# EAGLE board EagleSchematic (EAGLE 9.2.0)
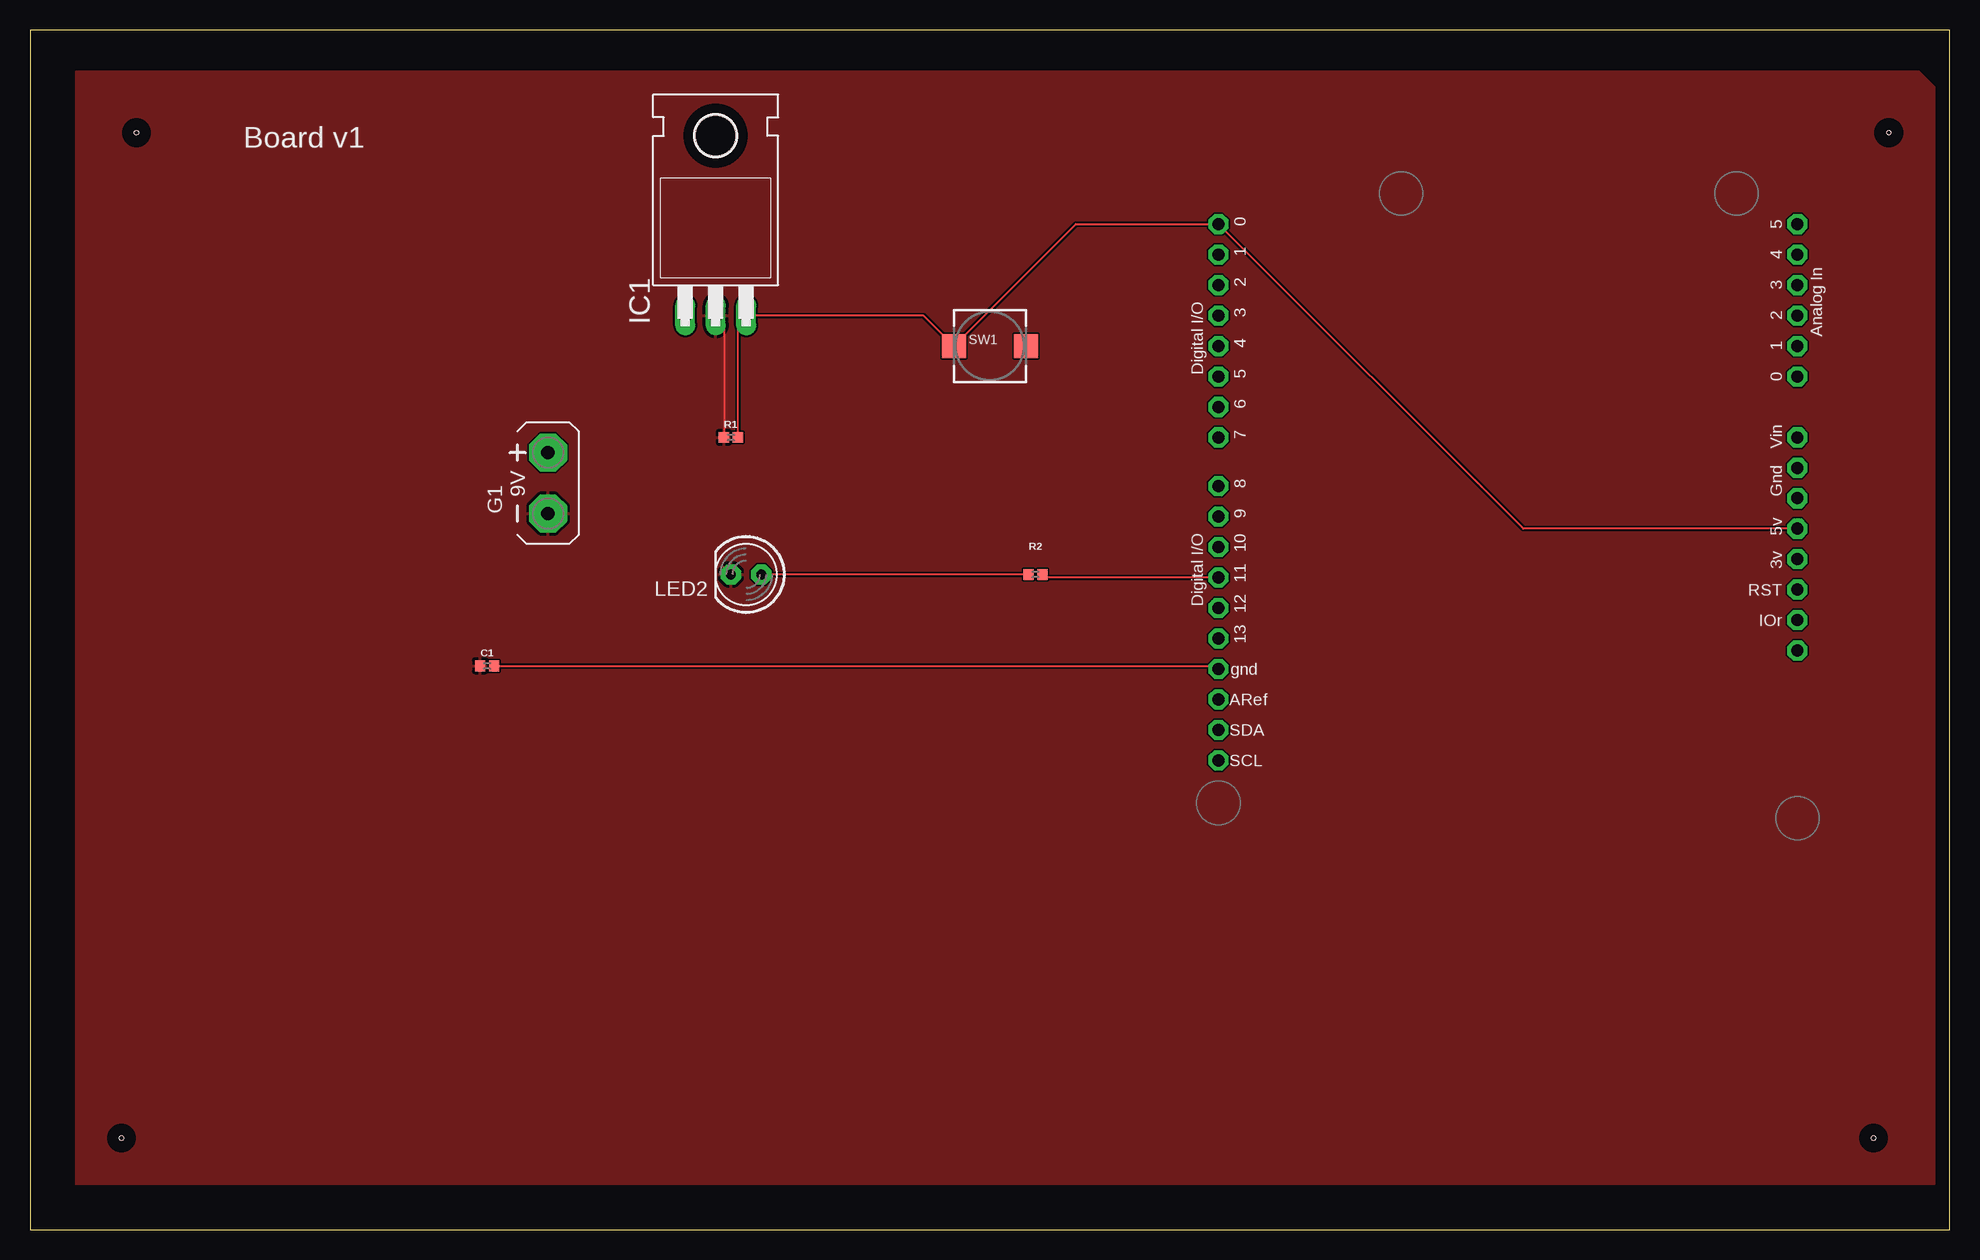
[diagram p0: board, top side]
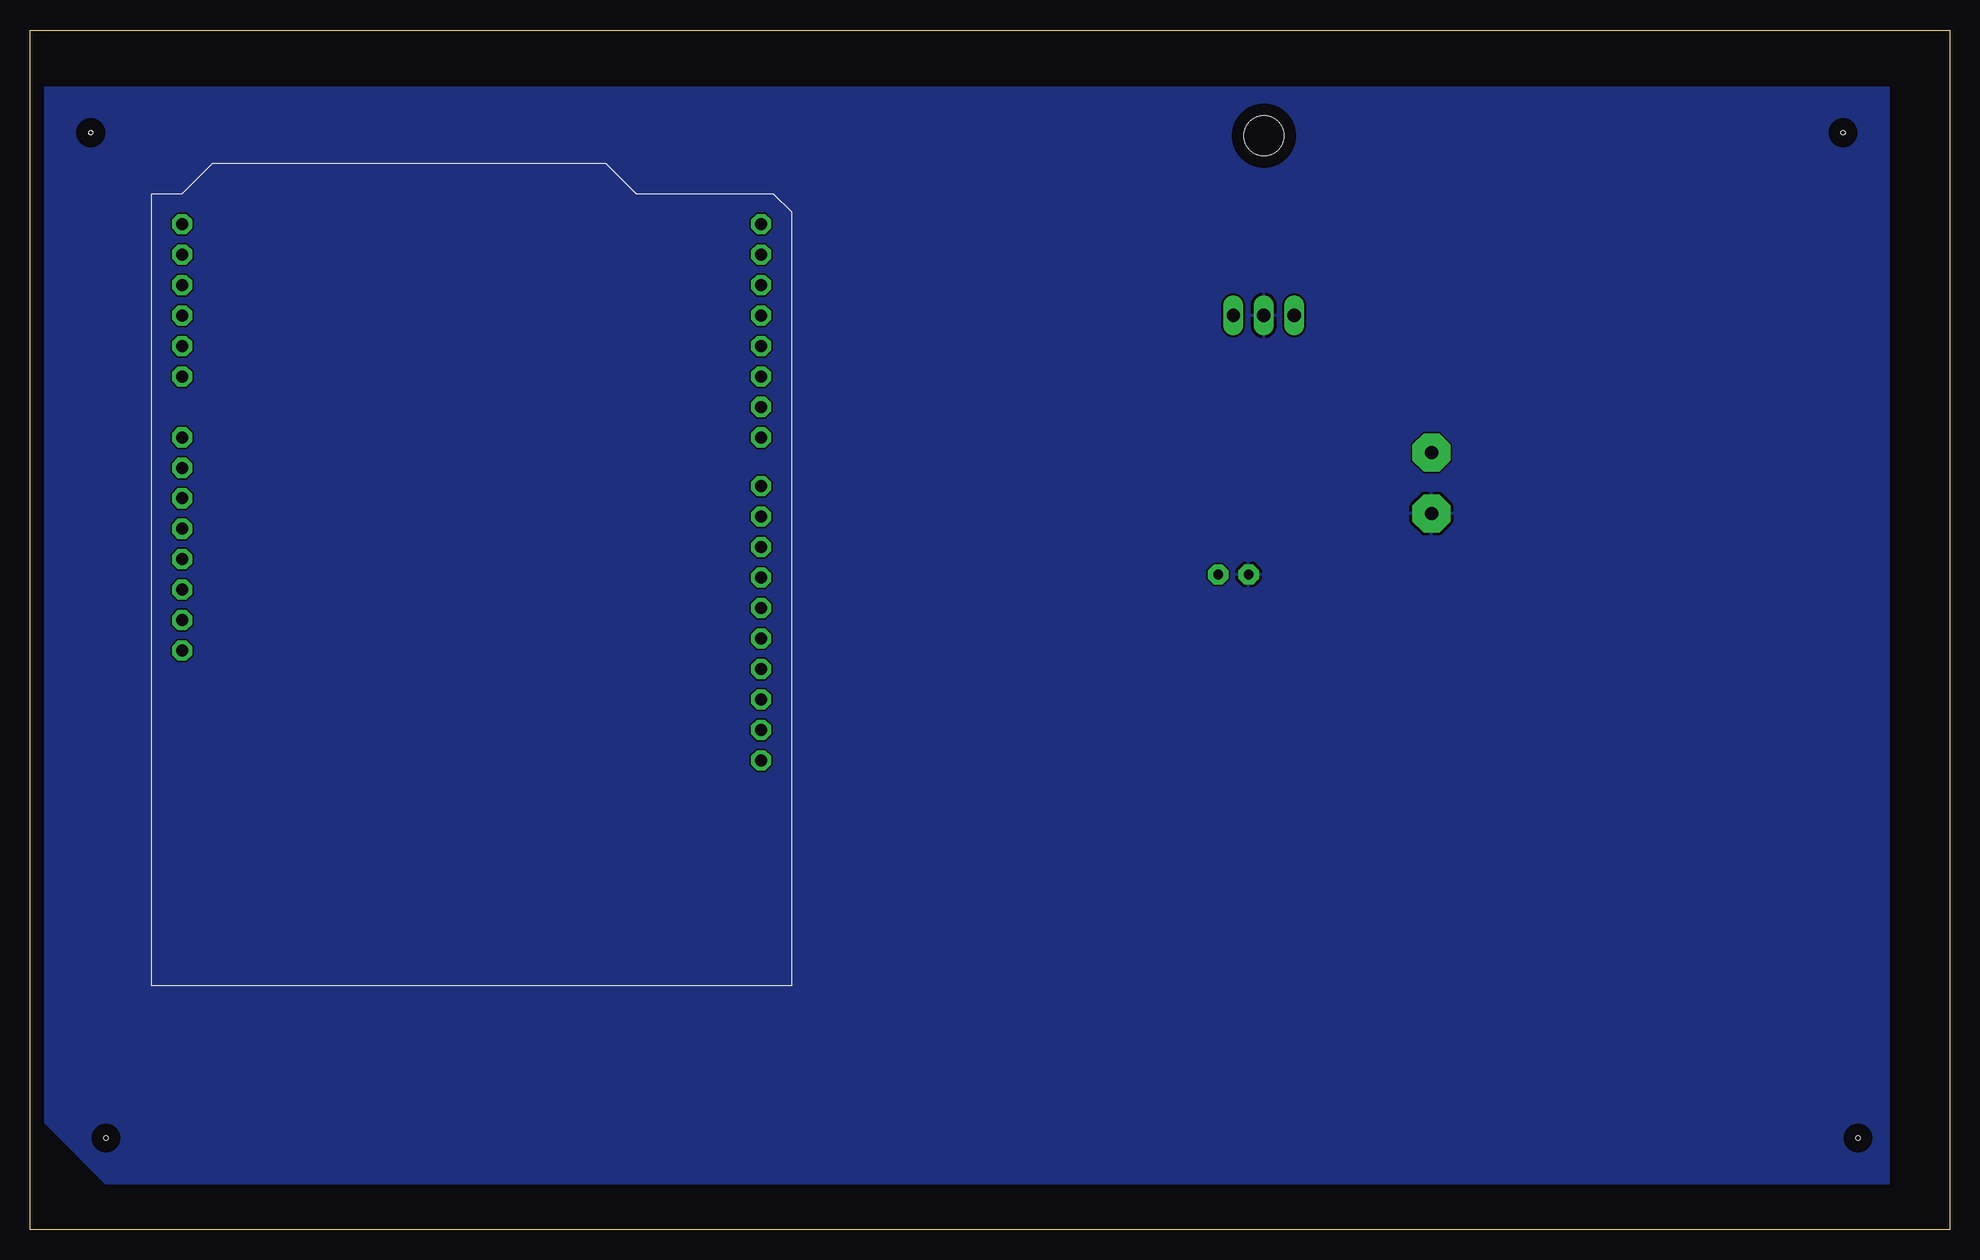
[diagram p1: board, bottom side, seen from below]

Size 160 x 100 mm. Coordinates in mm from the lower left corner, seen from the top.
Outline: 0,0 160,0 160,100 0,100 0,0
Copper layers (1*16): Top 0.035mm / dielectric 1.5mm / Bottom 0.035mm
Design rules "default": minimum track width 6mil, minimum drill 0.35mm, track to track 6mil, track to pad 6mil, pad to pad 6mil, via to via 6mil, smd to smd 6mil, copper to edge 40mil, drill to drill 6mil, minimum pad ring 10mil, minimum via ring 8mil, stop-mask expansion 4mil, vias tented up to drill 0mil, thermal gap 10mil
Holes 0.35 mm at 8.89,91.44 7.62,7.62 153.67,7.62 154.94,91.44 8.89,91.44 7.62,7.62 153.67,7.62 154.94,91.44

## Footprints (pad centres in the part's own frame; a part is rotated, then mirrored left to right if it is on the bottom)
0402 = smd 0.85 x 0.9: 1 -0.58,0; 2 0.58,0
AB9V = drill 1.118 pad 3.15 octagon: + 0,2.54; - 0,-2.54
TO220H = drill 1.118 long: 1 -2.54,-10.16; 2 0,-10.16; 3 2.54,-10.16 | hole 3.302: 0,4.826
LED5MM = drill 0.813 pad 1.676 octagon: A -1.27,0; K 1.27,0
PUSHBUTTON_SMD_SJ = smd 2 x 2: P$1 3,0; P$2 -3,0
ARDUINOR3-BPLACE = drill 1 pad 1.676 octagon: 3V 35.56,2.54; 5V 38.1,2.54; A0 50.8,2.54; A1 53.34,2.54; A2 55.88,2.54; A3 58.42,2.54; A4 60.96,2.54; A5 63.5,2.54; AREF 23.876,50.8; D0 63.5,50.8; D1 60.96,50.8; D2 58.42,50.8; D3 55.88,50.8; D4 53.34,50.8; D5 50.8,50.8; D6 48.26,50.8; D7 45.72,50.8; D8 41.656,50.8; D9 39.116,50.8; D10 36.576,50.8; D11 34.036,50.8; D12 31.496,50.8; D13 28.956,50.8; GND 26.416,50.8; GND1 43.18,2.54; GND2 40.64,2.54; IOREF 30.48,2.54; RESERVED 27.94,2.54; RESET 33.02,2.54; SCL 18.796,50.8; SDA 21.336,50.8; VIN 45.72,2.54

## Placement (x,y rotation side)
C1  0.1uF  [0402]  38.1,46.99 0 top
G1  AB9V  [AB9V]  43.18,62.23 0 top
IC1  7805T  [TO220H]  57.15,86.36 0 top
LED2  [LED5MM]  59.69,54.61 180 top
R1  100K  [0402]  58.42,66.04 0 top
R2  100K  [0402]  83.82,54.61 0 top
SW1  [PUSHBUTTON_SMD_SJ]  80.01,73.66 0 top
U1  ARDUINOR3-BPLACE  [ARDUINOR3-BPLACE]  149.86,20.32 90 top

## Library data of the parts
C1 = SparkFun-Capacitors; PROD_ID: CAP-12416
G1 = battery
IC1 LED2 SW1 U1 = adafruit
R1 R2 = SparkFun-Resistors; PROD_ID: RES-13495

## Nets
3V: U1.3V
GND: C1.1 G1.- IC1.2 LED2.K R1.1
GND1: U1.GND1
GND2: U1.GND2
N$1: IC1.1
N$2: G1.+
N$3: C1.2 U1.GND
N$4: R2.2 U1.D11
N$5: LED2.A R2.1
VCC: IC1.3 R1.2 SW1.P$2 U1.5V U1.D0
VIN: U1.VIN

## Tracks (layer width: path | path; a pad name or v marks a point on that pad's centre or on a via)
GND
  Top 0.152: LED2.K 57.84,55.19 | IC1.2 57.84,75.51 R1.1
  pour Top: 3.81,96.52 3.81,3.81 158.75,3.81 158.75,95.25 157.48,96.52
  pour Bottom: 5.08,95.25 5.08,3.81 153.67,3.81 158.75,8.89 158.75,95.25
N$3
  Top 0.152: C1.2 98.81,46.99 U1.GND
N$4
  Top 0.152: U1.D11 84.65,54.36 R2.2
N$5
  Top 0.152: R2.1 LED2.A
VCC
  Top 0.152: U1.5V 124.46,58.42 U1.D0 87.17,83.82 SW1.P$2 74.47,76.2 IC1.3 59,75.51 R1.2

## Text on the board
tPlace: Board v1